# Altium PCB Webbie-V3.2.PcbDoc (part 2 of 3)
Units mil, origin at the board's own origin, x right, y up, seen from the top; angles counter-clockwise.
Board outline 3937.01 x 1574.8 mil, 4 copper layers (Top Layer, Layer 1, Layer 2, Bottom Layer), stack 61.865 mil thick; 123 components, 84 nets, 458 pads, 249 vias.
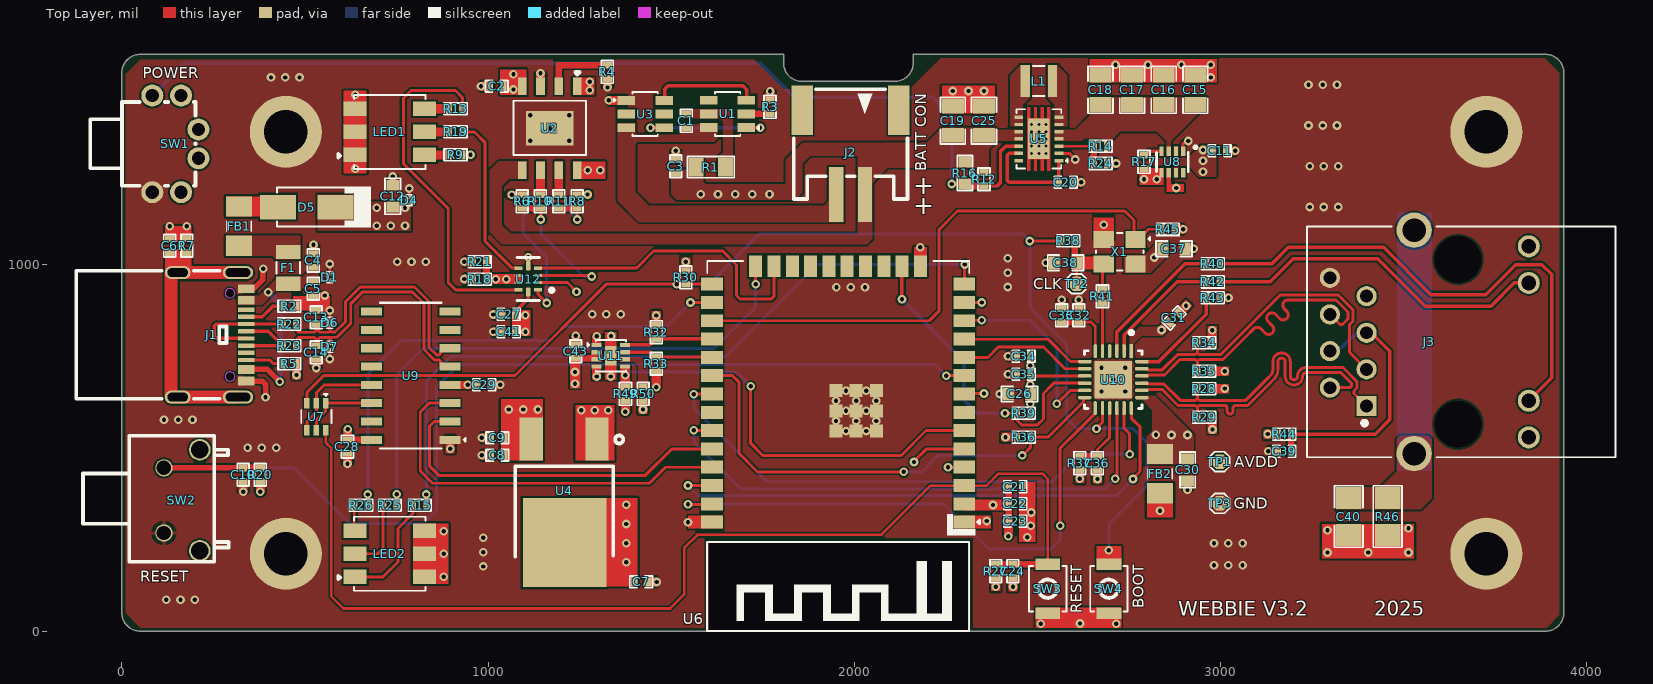
[diagram p0: Top Layer view]

## Part data (continued)
R2 R5: library part RC0402FR-075K1L, "RES 5.1K OHM 1% 1/16W 0402", Case Code (Imperial)=0402, Case Code (Metric)=1005, LCSC Part Number=C105872, Manufacturer=Yageo, Max Operating Temperature=155°C, Max Power Dissipation=63mW, Min Operating Temperature=-55°C, Package Quantity=1, Resistance=5.1kR, Resistance Tolerance=1%, Resistor Type="Thick Film", Temperature Coefficient=100ppm/°C, Voltage Rating=50V, Case/Package=0402, Category="Chip SMD Resistors", ComponentLink1Description=https://datasheet.ciiva.com/7983/1018594-7983519.pdf?src-supplier=Element14, ComponentLink1URL=https://datasheet.ciiva.com/7983/1018594-7983519.pdf?src-supplier=Element14, ComponentLink2Description=https://datasheet.ciiva.com/46394/1018594-46394936.pdf?src-supplier=Element14, ComponentLink2URL=https://datasheet.ciiva.com/46394/1018594-46394936.pdf?src-supplier=Element14, ComponentLink3Description=https://datasheet.ciiva.com/2453/pyu-r-int-thick-7-2453401.pdf?src-supplier=Digi-Key, ComponentLink3URL=https://datasheet.ciiva.com/2453/pyu-r-int-thick-7-2453401.pdf?src-supplier=Digi-Key, ComponentLink4Description=https://datasheet.ciiva.com/2453/pyu-r-int-thick-7-2453402.pdf?src-supplier=Digi-Key, ComponentLink4URL=https://datasheet.ciiva.com/2453/pyu-r-int-thick-7-2453402.pdf?src-supplier=Digi-Key, ComponentLink5Description=https://datasheet.ciiva.com/2453/pyu-r-int-thick-7-2453400.pdf?src-supplier=Digi-Key, ComponentLink5URL=https://datasheet.ciiva.com/2453/pyu-r-int-thick-7-2453400.pdf?src-supplier=Digi-Key, ComponentLink6Description=https://datasheet.ciiva.com/12558/pyu-rc0402-51-rohs-l-6-r-8721-12558460.pdf?src-supplier=Mouser, ComponentLink6URL=https://datasheet.ciiva.com/12558/pyu-rc0402-51-rohs-l-6-r-8721-12558460.pdf?src-supplier=Mouser, ComponentLink7Description=https://datasheet.ciiva.com/16744/pyu-rc0402-51-rohs-l-6-r-16744283.pdf?src-supplier=Future+Electronics, ComponentLink7URL=https://datasheet.ciiva.com/16744/pyu-rc0402-51-rohs-l-6-r-16744283.pdf?src-supplier=Future+Electronics, ComponentLink8Description=https://datasheet.ciiva.com/15189/getdatasheetpartid-323636-15189493.pdf?src-supplier=Verical, ComponentLink8URL=https://datasheet.ciiva.com/15189/getdatasheetpartid-323636-15189493.pdf?src-supplier=Verical, Construction=Rectangular, Depth=0.5mm, Features="Moisture Resistant", Height=0.016inch, Item Type=Resistor, Lead Free="Lead Free", Length=1mm, Manufacturer Part Number=RC0402FR-075K1L, Military Standard=Not, Number of Terminations=2, Packaging="Tape and Reel", Power Rating=63mW, Pricing 1="10000=0.00085 (USD)", RoHS=Yes, RoHS Compliant=Yes, Series=RC, Stock 1=65000, Supplier 1=Avnet, Supplier Part Number 1=RC0402FR-075K1L, Technology="THICK FILM", Termination=SMD/SMT, Tolerance=1%, Voltage Rating (DC)=50V, Width=0.02inch, Working Voltage=50V
R3: library part CRCW04021K00FKEDHP, "RES SMD 1K OHM 1% 1/5W 0402", Case Code (Imperial)=0402, Case Code (Metric)=1005, LCSC Part Number=C313354, Manufacturer="Vishay Dale", Max Operating Temperature=155°C, Max Power Dissipation=125mW, Min Operating Temperature=-55°C, Package Quantity=10, Resistance=1kR, Resistance Tolerance=1%, Resistor Type="Thick Film", Supplier Part Number 1=541-1.00KYCT-ND, Temperature Coefficient=100ppm/°C, Voltage Rating=50V, Case/Package=0402, ComponentLink1Description=http://www.farnell.com/datasheets/2339608.pdf?src-supplier=Element14, ComponentLink1URL=http://www.farnell.com/datasheets/2339608.pdf?src-supplier=Element14, ComponentLink2Description=http://www.vishay.com/docs/20043/crcwhpe3.pdf?src-supplier=Digi-Key, ComponentLink2URL=http://www.vishay.com/docs/20043/crcwhpe3.pdf?src-supplier=Digi-Key, ComponentLink3Description=http://www.mouser.com/ds/2/427/crcwhpe3-46056.pdf?src-supplier=Mouser, ComponentLink3URL=http://www.mouser.com/ds/2/427/crcwhpe3-46056.pdf?src-supplier=Mouser, ComponentLink4Description=http://www.vishay.com/docs/20043/crcwhpe3.pdf?src-supplier=Avnet, ComponentLink4URL=http://www.vishay.com/docs/20043/crcwhpe3.pdf?src-supplier=Avnet, ComponentLink5Description=http://www.vishay.com/docs/20043/crcwhpe3.pdf?src-supplier=Future+Electronics, ComponentLink5URL=http://www.vishay.com/docs/20043/crcwhpe3.pdf?src-supplier=Future+Electronics, Construction=Rectangular, Contact Plating=Tin, Depth=0.5mm, Features="Automotive AEC-Q200", Height=0.3mm, Lead Free="Lead Free", Length=1mm, Manufacturer Part Number=CRCW04021K00FKEDHP, Military Standard=Not, Mount="Surface Mount", Number of Pins=2, Number of Terminations=2, Packaging="Tape and Reel", Power Rating=125mW, Pricing 1="1=0.15, 10=0.132, 100=0.0506, 1000=0.02226, 2500=0.01923, 5000=0.0172 (USD)", Radiation Hardening=No, REACH SVHC=Unknown, RoHS Compliant=Yes, Series=CRCW-HP, Size Code=0402, Stock 1=315989, Supplier 1=Digi-Key, Technology="THICK FILM", Termination=SMD/SMT, Tolerance=1%, Voltage Rating (DC)=50V, Weight=2.3E-05oz, Width=0.5mm
R4: library part RC0402FR-071K2L, "RES 1.2K OHM 1% 1/16W 0402", Case Code (Imperial)=0402, Case Code (Metric)=1005, LCSC Part Number=C138040, Manufacturer=Yageo, Max Operating Temperature=155°C, Max Power Dissipation=63mW, Min Operating Temperature=-55°C, Package Quantity=1, Resistance=1.2kR, Resistance Tolerance=1%, Resistor Type="Thick Film", Temperature Coefficient=100ppm/°C, Voltage Rating=50V, Case/Package=0402, Category="Chip SMD Resistors", ComponentLink1Description=https://datasheet.ciiva.com/11808/0900766b80c66297-11808455.pdf?src-supplier=RSComponents, ComponentLink1URL=https://datasheet.ciiva.com/11808/0900766b80c66297-11808455.pdf?src-supplier=RSComponents, ComponentLink2Description=https://datasheet.ciiva.com/2453/pyu-r-int-thick-7-2453467.pdf?src-supplier=Digi-Key, ComponentLink2URL=https://datasheet.ciiva.com/2453/pyu-r-int-thick-7-2453467.pdf?src-supplier=Digi-Key, ComponentLink3Description=https://datasheet.ciiva.com/2453/pyu-r-int-thick-7-2453468.pdf?src-supplier=Digi-Key, ComponentLink3URL=https://datasheet.ciiva.com/2453/pyu-r-int-thick-7-2453468.pdf?src-supplier=Digi-Key, ComponentLink4Description=https://datasheet.ciiva.com/2453/pyu-r-int-thick-7-2453466.pdf?src-supplier=Digi-Key, ComponentLink4URL=https://datasheet.ciiva.com/2453/pyu-r-int-thick-7-2453466.pdf?src-supplier=Digi-Key, ComponentLink5Description=https://datasheet.ciiva.com/7849/1018594-7849861.pdf?src-supplier=Element14, ComponentLink5URL=https://datasheet.ciiva.com/7849/1018594-7849861.pdf?src-supplier=Element14, ComponentLink6Description=https://datasheet.ciiva.com/7849/1018594-7849862.pdf?src-supplier=Element14, ComponentLink6URL=https://datasheet.ciiva.com/7849/1018594-7849862.pdf?src-supplier=Element14, ComponentLink7Description=https://datasheet.ciiva.com/15189/getdatasheetpartid-323716-15189366.pdf?src-supplier=Verical, ComponentLink7URL=https://datasheet.ciiva.com/15189/getdatasheetpartid-323716-15189366.pdf?src-supplier=Verical, ComponentLink8Description=https://datasheet.ciiva.com/16745/pyu-rc0402-51-rohs-l-6-r-16745005.pdf?src-supplier=Future+Electronics, ComponentLink8URL=https://datasheet.ciiva.com/16745/pyu-rc0402-51-rohs-l-6-r-16745005.pdf?src-supplier=Future+Electronics, Construction=Rectangular, Depth=0.5mm, Features="Moisture Resistant", Height=0.016inch, Item Type=Resistor, Lead Free="Lead Free", Length=0.039inch, Manufacturer Part Number=RC0402FR-071K2L, Military Standard=Not, Number of Terminations=2, Packaging="Tape and Reel", Power Rating=63mW, Pricing 1="10000=0.00085 (USD)", RoHS=Yes, RoHS Compliant=Yes, Series=RC, Size Code=0402, Stock 1=170000, Supplier 1=Avnet, Supplier Part Number 1=RC0402FR-071K2L, Technology="THICK FILM", Termination=SMD/SMT, Tolerance=1%, Width=0.02inch
R6 R8 R17 R18 R20 R21 R27 R30 R32 R33 R37 R39 R45 R49 R50: library part RC0402FR-0710KL, "RES 10K OHM 1% 1/16W 0402", Case Code (Imperial)=0402, Case Code (Metric)=1005, LCSC Part Number=C60490, Manufacturer=Yageo, Max Operating Temperature=155°C, Max Power Dissipation=63mW, Min Operating Temperature=-55°C, Power Rating=62.5mW, Resistance=10kR, Resistance Tolerance=1%, Resistor Type="Thick Film", Supplier Part Number 1=603-RC0402FR-0710KL, Temperature Coefficient=100ppm/°C, Voltage Rating=50V, Case/Package=0402, Category="Chip SMD Resistors", ComponentLink1Description=https://datasheet.ciiva.com/7660/38568-7660787.pdf?src-supplier=Element14, ComponentLink1URL=https://datasheet.ciiva.com/7660/38568-7660787.pdf?src-supplier=Element14, ComponentLink2Description=https://datasheet.ciiva.com/7849/1686128-7849814.pdf?src-supplier=Element14, ComponentLink2URL=https://datasheet.ciiva.com/7849/1686128-7849814.pdf?src-supplier=Element14, ComponentLink3Description=https://datasheet.ciiva.com/7983/1018594-7983486.pdf?src-supplier=Element14, ComponentLink3URL=https://datasheet.ciiva.com/7983/1018594-7983486.pdf?src-supplier=Element14, ComponentLink4Description=https://datasheet.ciiva.com/22747/1018594-22747512.pdf?src-supplier=Element14, ComponentLink4URL=https://datasheet.ciiva.com/22747/1018594-22747512.pdf?src-supplier=Element14, ComponentLink5Description=https://datasheet.ciiva.com/12667/pyu-rc0402-51-rohs-l-6-r-12667067.pdf?src-supplier=Mouser, ComponentLink5URL=https://datasheet.ciiva.com/12667/pyu-rc0402-51-rohs-l-6-r-12667067.pdf?src-supplier=Mouser, ComponentLink6Description=https://datasheet.ciiva.com/7849/1784430-7849813.pdf?src-supplier=Element14, ComponentLink6URL=https://datasheet.ciiva.com/7849/1784430-7849813.pdf?src-supplier=Element14, ComponentLink7Description=https://datasheet.ciiva.com/7849/1784430-7849815.pdf?src-supplier=Element14, ComponentLink7URL=https://datasheet.ciiva.com/7849/1784430-7849815.pdf?src-supplier=Element14, Construction=Rectangular, Depth=0.5mm, Features="Moisture Resistant", Height=0.32mm, Item Type=Resistor, Lead Free="Lead Free", Lead Pitch=0.2mm, Length=1mm, Manufacturer Part Number=RC0402FR-0710KL, Military Standard=Not, Number of Pins=2, Number of Terminations=2, Packaging="Tape and Reel", Pricing 1="1=0.10000, 10=0.01400, 50=0.01400, 100=0.00500, 1000=0.00300, 10000=0.00200 (USD)", REACH SVHC="No SVHC", RoHS=Yes, RoHS Compliant=Yes, Series=RC, Stock 1=18648329, Supplier 1=Mouser, Termination=SMD/SMT, Tolerance=1%, Voltage Rating (DC)=50V, Width=0.5mm, Working Voltage=50V
R7: library part AF0402JR-071ML, "RES SMD 1M OHM 5% 1/16W 0402", Case/Package=0402, LCSC Part Number=C144054, Manufacturer=Yageo, Max Operating Temperature=155°C, Max Power Dissipation=63mW, Min Operating Temperature=-55°C, Resistance=1MR, Resistor Type="Thick Film", Supplier Part Number 1=AF0402JR-071ML-ND, Temperature Coefficient=100ppm/°C, Tolerance=5%, ComponentLink1Description=https://www.yageo.com/upload/media/product/productsearch/datasheet/rchip/PYu-AF_51_RoHS_L_6.pdf?src-supplier=Digi-Key, ComponentLink1URL=https://www.yageo.com/upload/media/product/productsearch/datasheet/rchip/PYu-AF_51_RoHS_L_6.pdf?src-supplier=Digi-Key, Features="Moisture Resistant,Anti-Sulfur", Height=0.015inch, Item Type=Resistor, Length=0.039inch, Manufacturer Part Number=AF0402JR-071ML, Number of Terminations=2, Packaging="Tape and Reel", Pricing 1="10000=0.00408 (USD)", RoHS Compliant=Yes, Stock 1=0, Supplier 1=Digi-Key, Width=0.02inch
R9 R13 R15 R19 R25 R26 R40 R42: library part RC0402FR-07470RL, "RES 470 OHM 1% 1/16W 0402", Case Code (Imperial)=0402, Case Code (Metric)=1005, LCSC Part Number=C114877, Manufacturer=Yageo, Max Operating Temperature=155°C, Max Power Dissipation=63mW, Min Operating Temperature=-55°C, Package Quantity=1, Power Rating=62.5mW, Resistance Tolerance=1%, Resistor Type="Thick Film", Temperature Coefficient=100ppm/°C, Voltage Rating=50V, Case/Package=0402, ComponentLink1Description=https://datasheet.ciiva.com/46412/1018594-46412838.pdf?src-supplier=Element14, ComponentLink1URL=https://datasheet.ciiva.com/46412/1018594-46412838.pdf?src-supplier=Element14, ComponentLink2Description=https://datasheet.ciiva.com/2453/pyu-r-int-thick-7-2453377.pdf?src-supplier=Digikey, ComponentLink2URL=https://datasheet.ciiva.com/2453/pyu-r-int-thick-7-2453377.pdf?src-supplier=Digikey, ComponentLink3Description=https://datasheet.ciiva.com/2453/pyu-r-int-thick-7-2453378.pdf?src-supplier=Digikey, ComponentLink3URL=https://datasheet.ciiva.com/2453/pyu-r-int-thick-7-2453378.pdf?src-supplier=Digikey, ComponentLink4Description=https://datasheet.ciiva.com/2453/pyu-r-int-thick-7-2453376.pdf?src-supplier=Digikey, ComponentLink4URL=https://datasheet.ciiva.com/2453/pyu-r-int-thick-7-2453376.pdf?src-supplier=Digikey, ComponentLink5Description=https://datasheet.ciiva.com/7850/1018594-7850015.pdf?src-supplier=Element14, ComponentLink5URL=https://datasheet.ciiva.com/7850/1018594-7850015.pdf?src-supplier=Element14, ComponentLink6Description=https://datasheet.ciiva.com/7850/1018594-7850014.pdf?src-supplier=Element14, ComponentLink6URL=https://datasheet.ciiva.com/7850/1018594-7850014.pdf?src-supplier=Element14, ComponentLink7Description=https://datasheet.ciiva.com/15189/getdatasheetpartid-330246-15189463.pdf?src-supplier=Verical, ComponentLink7URL=https://datasheet.ciiva.com/15189/getdatasheetpartid-330246-15189463.pdf?src-supplier=Verical, Construction=Rectangular, Depth=0.5mm, Features="Moisture Resistant", Height=0.016inch, Item Type=Resistor, Lead Free="Lead Free", Length=1mm, Manufacturer Part Number=RC0402FR-07470RL, Military Standard=Not, Number of Terminations=2, Packaging="Tape and Reel", Pricing="10000=0.00085 (USD)", Reach SVHC Compliant=No, RoHS=Yes, RoHS Compliant=Yes, Series=RC, Stock=10000, Supplier=Avnet, Supplier Part Number=RC0402FR-07470RL, Termination=SMD/SMT, Tolerance=1%, Voltage Rating (AC)=50V, Width=0.02inch, Working Voltage=50V
R10 R11 R12 R44: library part RC0402FR-070RL, "RES 0 OHM JUMPER 1/16W 0402", Case Code (Imperial)=0402, Case Code (Metric)=1005, LCSC Part Number=C106231, Manufacturer=Yageo, Max Operating Temperature=155°C, Max Power Dissipation=63mW, Min Operating Temperature=-55°C, Power Rating=62.5mW, Resistor Type="Thick Film", Supplier Part Number 1=603-RC0402FR-070RL, Temperature Coefficient=200ppm/°C, Tolerance=1%, Voltage Rating=50V, Case/Package=0402, ComponentLink1Description=https://datasheet.ciiva.com/8896/pyu-rc0402-51-rohs-l-6-8896149.pdf?src-supplier=Avnet, ComponentLink1URL=https://datasheet.ciiva.com/8896/pyu-rc0402-51-rohs-l-6-8896149.pdf?src-supplier=Avnet, ComponentLink2Description=https://datasheet.ciiva.com/16790/pyu-rc0402-51-rohs-l-6-r-16790444.pdf?src-supplier=Future+Electronics, ComponentLink2URL=https://datasheet.ciiva.com/16790/pyu-rc0402-51-rohs-l-6-r-16790444.pdf?src-supplier=Future+Electronics, Contact Plating=Tin,Matte, Features="Moisture Resistant", Height=0.35mm, Item Type=Resistors, Lead Free="Lead Free", Length=1mm, Manufacturer Part Number=RC0402FR-070RL, Mount="Surface Mount", Number of Terminations=2, Packaging="Tape and Reel", Pricing 1="1=0.10000, 10=0.01400, 50=0.01400, 100=0.00600, 1000=0.00300, 5000=0.00200, 10000=0.00100 (USD)", Radiation Hardening=No, Resistance=0R, RoHS=Yes, RoHS Compliant=Yes, Series=RC, Size Code=0402, Stock 1=8556842, Supplier 1=Mouser, Termination=SMD/SMT, Width=0.5mm
R14: library part AC0402FR-07768KL, "62.5mW Thick Film Resistor 50V ±100ppm/℃ ±1% 768kΩ 0402 Chip Resistor - Surface Mount ROHS", LCSC Part Number=C227223, Manufacturer=YAGEO, Package=0402, ComponentLink1Description="LCSC Link", ComponentLink1URL=https://lcsc.com/product-detail/Chip-Resistor-Surface-Mount_YAGEO-AC0402FR-07768KL_C227223.html, Item Type=Resistor, Manufacturer Part Number=AC0402FR-07768KL
R16: library part RT0603BRD0710KL, "RES SMD 10K OHM 0.1% 1/10W 0603", Case/Package=0603, LCSC Part Number=C95204, Manufacturer=Yageo, Max Operating Temperature=155°C, Min Operating Temperature=-55°C, Package Height=0.45mm, Package Length=1.6mm, Package Style=SMTMeter, Package Width=0.8mm, Power=100mW, Rated Temperature=70°C, Resistor Type="FIXED RESISTOR", Supplier Part Number 1=1991391P, Temperature Coefficient=25ppm/°C, Tolerance=0.1%, Working Voltage=75V, Category="Chip SMD Resistors", ComponentLink1Description=https://datasheet.ciiva.com:443/pdfs/VipMasterIC/IC/YAGO/YAGO-S-A0008510989/YAGO-S-A0008510989-1.pdf?src-supplier=IHS+Markit, ComponentLink1URL=https://datasheet.ciiva.com:443/pdfs/VipMasterIC/IC/YAGO/YAGO-S-A0008510989/YAGO-S-A0008510989-1.pdf?src-supplier=IHS+Markit, ComponentLink2Description=https://datasheet.ciiva.com/5624/pyu-rt-1-to-0-05-rohs-l-4-5624351.pdf?src-supplier=Mouser, ComponentLink2URL=https://datasheet.ciiva.com/5624/pyu-rt-1-to-0-05-rohs-l-4-5624351.pdf?src-supplier=Mouser, ComponentLink3Description=https://datasheet.ciiva.com/29721/pyu-rt-1-to-0-05-rohs-l-4-29721177.pdf?src-supplier=Digi-Key, ComponentLink3URL=https://datasheet.ciiva.com/29721/pyu-rt-1-to-0-05-rohs-l-4-29721177.pdf?src-supplier=Digi-Key, Construction=Chip, Item Type=Resistor, Manufacturer Part Number=RT0603BRD0710KL, Mounting Technology="Surface Mount", Packaging="Tape and Reel", Pins=2, Pricing 1="100=0.29800, 250=0.27800, 500=0.25900, 1000=0.23700 (GBP)", Reach SVHC Compliant=Yes, RoHS=Yes, RoHS Compliant=Yes, Stock 1=20510, Supplier 1=Rs, Technology="THIN FILM", Termination=Wraparound
R22 R23: library part RC0402FR-0727RL, "62.5mW Thick Film Resistors 50V ±100ppm/℃ ±1% 27Ω 0402 Chip Resistor - Surface Mount ROHS", LCSC Part Number=C138021, Manufacturer=YAGEO, Package=0402, ComponentLink1Description="LCSC Link", ComponentLink1URL=https://www.lcsc.com/product-detail/Chip-Resistor-Surface-Mount_YAGEO-RC0402FR-0727RL_C138021.html, Item Type=Resistor, Manufacturer Part Number=RC0402FR-0727RL
R24: library part FRC0402F1373TS, "62.5mW Thick Film Resistor 50V ±100ppm/℃ ±1% 137kΩ 0402 Chip Resistor - Surface Mount ROHS", LCSC Part Number=C5153963, Manufacturer=FOJAN, Package=0402, ComponentLink1Description="LCSC Link", ComponentLink1URL=https://lcsc.com/product-detail/Chip-Resistor-Surface-Mount_FOJAN-FRC0402F1373TS_C5153963.html, Item Type=Resistor, Manufacturer Part Number=FRC0402F1373TS
R28 R29 R34 R35: library part RC0402FR-0749R9L, "49.9Ω 62.5mW 50V ±100ppm/℃ Thick Film Resistor ±1% 0402 Chip Resistor - Surface Mount ROHS", LCSC Part Number=C87044, Manufacturer=YAGEO, Package=0402, ComponentLink1Description="LCSC Link", ComponentLink1URL=https://www.lcsc.com/product-detail/C87044.html, Item Type=Resistor, Manufacturer Part Number=RC0402FR-0749R9L
R36: library part RC0402FR-071K5L, "RES 1.5K OHM 1% 1/16W 0402", Case Code (Imperial)=0402, Case Code (Metric)=1005, LCSC Part Number=C114759, Manufacturer=Yageo, Max Operating Temperature=155°C, Max Power Dissipation=63mW, Min Operating Temperature=-55°C, Package Quantity=1, Power Rating=62.5mW, Resistance=1.5kR, Resistance Tolerance=1%, Resistor Type="Thick Film", Supplier Part Number 1=311-1.50KLRCT-ND, Temperature Coefficient=100ppm/°C, Voltage Rating=50V, Case/Package=0402, Category="Chip SMD Resistors", ComponentLink1Description=https://datasheet.ciiva.com/11808/0900766b80c66297-11808238.pdf?src-supplier=RSComponents, ComponentLink1URL=https://datasheet.ciiva.com/11808/0900766b80c66297-11808238.pdf?src-supplier=RSComponents, ComponentLink2Description=https://datasheet.ciiva.com/46394/1018594-46394950.pdf?src-supplier=Element14, ComponentLink2URL=https://datasheet.ciiva.com/46394/1018594-46394950.pdf?src-supplier=Element14, ComponentLink3Description=https://datasheet.ciiva.com/2453/pyu-r-int-thick-7-2453440.pdf?src-supplier=Digi-Key, ComponentLink3URL=https://datasheet.ciiva.com/2453/pyu-r-int-thick-7-2453440.pdf?src-supplier=Digi-Key, ComponentLink4Description=https://datasheet.ciiva.com/2453/pyu-r-int-thick-7-2453441.pdf?src-supplier=Digi-Key, ComponentLink4URL=https://datasheet.ciiva.com/2453/pyu-r-int-thick-7-2453441.pdf?src-supplier=Digi-Key, ComponentLink5Description=https://datasheet.ciiva.com/2453/pyu-r-int-thick-7-2453439.pdf?src-supplier=Digi-Key, ComponentLink5URL=https://datasheet.ciiva.com/2453/pyu-r-int-thick-7-2453439.pdf?src-supplier=Digi-Key, ComponentLink6Description=https://datasheet.ciiva.com/12558/pyu-rc0402-51-rohs-l-6-r-8721-12558542.pdf?src-supplier=Mouser, ComponentLink6URL=https://datasheet.ciiva.com/12558/pyu-rc0402-51-rohs-l-6-r-8721-12558542.pdf?src-supplier=Mouser, ComponentLink7Description=https://datasheet.ciiva.com/7849/1018594-7849863.pdf?src-supplier=Element14, ComponentLink7URL=https://datasheet.ciiva.com/7849/1018594-7849863.pdf?src-supplier=Element14, ComponentLink8Description=https://datasheet.ciiva.com/7849/1018594-7849864.pdf?src-supplier=Element14, ComponentLink8URL=https://datasheet.ciiva.com/7849/1018594-7849864.pdf?src-supplier=Element14, ComponentLink9Description=https://datasheet.ciiva.com/15189/getdatasheetpartid-323992-15189370.pdf?src-supplier=Verical, ComponentLink9URL=https://datasheet.ciiva.com/15189/getdatasheetpartid-323992-15189370.pdf?src-supplier=Verical, Construction=Rectangular, Depth=0.5mm, Features="Moisture Resistant", Height=0.016inch, Lead Free="Lead Free", Length=1mm, Manufacturer Part Number=RC0402FR-071K5L, Military Standard=Not, Number of Terminations=2, Packaging="Tape and Reel", Pricing 1="1=0.10000, 10=0.01500, 100=0.00610, 1000=0.00275, 2500=0.00239, 5000=0.00197 (USD)", REACH SVHC="No SVHC", RoHS=Yes, RoHS Compliant=Yes, Series=RC, Size Code=0402, Stock 1=2832947, Supplier 1=Digi-Key, Technology="THICK FILM", Termination=SMD/SMT, Tolerance=1%, Width=0.02inch
R38 R41: library part RC0402FR-0733RL, "RES 33 OHM 1% 1/16W 0402", Case Code (Imperial)=0402, Case Code (Metric)=1005, LCSC Part Number=C138002, Manufacturer=Yageo, Max Operating Temperature=155°C, Max Power Dissipation=63mW, Min Operating Temperature=-55°C, Package Quantity=10000, Power Rating=62.5mW, Resistance Tolerance=1%, Resistor Type="Thick Film", Supplier Part Number 1=603-RC0402FR-0733RL, Temperature Coefficient=100ppm/°C, Voltage Rating=50V, Case/Package=0402, Category="Chip SMD Resistors", ComponentLink1Description=https://datasheet.ciiva.com/11819/0900766b80c66297-11819487.pdf?src-supplier=RSComponents, ComponentLink1URL=https://datasheet.ciiva.com/11819/0900766b80c66297-11819487.pdf?src-supplier=RSComponents, ComponentLink2Description=https://datasheet.ciiva.com/24070/pyu-rc0402-51-rohs-l-6-r-8721-24070077.pdf?src-supplier=Mouser, ComponentLink2URL=https://datasheet.ciiva.com/24070/pyu-rc0402-51-rohs-l-6-r-8721-24070077.pdf?src-supplier=Mouser, ComponentLink3Description=https://datasheet.ciiva.com/7849/1018594-7849967.pdf?src-supplier=Element14, ComponentLink3URL=https://datasheet.ciiva.com/7849/1018594-7849967.pdf?src-supplier=Element14, ComponentLink4Description=https://datasheet.ciiva.com/7849/1018594-7849966.pdf?src-supplier=Element14, ComponentLink4URL=https://datasheet.ciiva.com/7849/1018594-7849966.pdf?src-supplier=Element14, ComponentLink5Description=https://datasheet.ciiva.com/15189/getdatasheetpartid-329253-15189431.pdf?src-supplier=Verical, ComponentLink5URL=https://datasheet.ciiva.com/15189/getdatasheetpartid-329253-15189431.pdf?src-supplier=Verical, ComponentLink6Description=https://datasheet.ciiva.com/17070/pyu-rc0402-51-rohs-l-6-r-17070335.pdf?src-supplier=Future+Electronics, ComponentLink6URL=https://datasheet.ciiva.com/17070/pyu-rc0402-51-rohs-l-6-r-17070335.pdf?src-supplier=Future+Electronics, Construction=Rectangular, Depth=0.5mm, Features="Moisture Resistant", Height=0.35mm, Lead Free="Lead Free", Length=1mm, Manufacturer Part Number=RC0402FR-0733RL, Military Standard=Not, Number of Pins=2, Number of Terminations=2, Packaging="Tape and Reel", Pricing 1="1=0.10000, 10=0.01200, 50=0.01200, 100=0.00500, 1000=0.00300, 10000=0.00100 (USD)", REACH SVHC=Unknown, Resistance=33R, RoHS=Yes, RoHS Compliant=Yes, Series=RC, Size Code=0402, Stock 1=1843488, Supplier 1=Mouser, Technology="THICK FILM", Termination=SMD/SMT, Tolerance=1%, Voltage Rating (DC)=50V, Width=0.5mm
R43: library part RT0402BRD0712K1L, "RES SMD 12.1KOHM 0.1% 1/16W 0402", LCSC Part Number=C281773, Manufacturer=Yageo, Supplier Part Number=2068365, Category="Chip SMD Resistors", ComponentLink1Description=https://datasheet.ciiva.com/12812/pyu-rt-1-to-0-05-rohs-l-4-12812462.pdf?src-supplier=Mouser, ComponentLink1URL=https://datasheet.ciiva.com/12812/pyu-rt-1-to-0-05-rohs-l-4-12812462.pdf?src-supplier=Mouser, Item Type=Resistor, Manufacturer Part Number=RT0402BRD0712K1L, Pricing="10000=0.0245, 20000=0.0217, 30000=0.0237, 50000=0.0233, 100000=0.0228, 200000=0.022 (USD)", RoHS=Yes, Stock=60000, Supplier="Future Electronics"
R46: library part RC1206FR-071ML, "RES 1M OHM 1% 1/4W 1206", Case Code (Imperial)=1206, Case Code (Metric)=3216, LCSC Part Number=C108083, Manufacturer=Yageo, Max Operating Temperature=155°C, Max Power Dissipation=250mW, Min Operating Temperature=-55°C, Package Quantity=5000, Resistance=1MR, Resistance Tolerance=1%, Resistor Type="Thick Film", Temperature Coefficient=100ppm/°C, Voltage Rating=200V, Case/Package=1206, Category="Chip SMD Resistors", ComponentLink1Description=https://datasheet.ciiva.com/11819/0900766b80c6630a-11819912.pdf?src-supplier=RSComponents, ComponentLink1URL=https://datasheet.ciiva.com/11819/0900766b80c6630a-11819912.pdf?src-supplier=RSComponents, ComponentLink2Description=https://datasheet.ciiva.com/46445/444357-46445709.pdf?src-supplier=Element14, ComponentLink2URL=https://datasheet.ciiva.com/46445/444357-46445709.pdf?src-supplier=Element14, ComponentLink3Description=https://datasheet.ciiva.com/7857/444357-7857289.pdf?src-supplier=Element14, ComponentLink3URL=https://datasheet.ciiva.com/7857/444357-7857289.pdf?src-supplier=Element14, ComponentLink4Description=https://datasheet.ciiva.com/7857/444357-7857288.pdf?src-supplier=Element14, ComponentLink4URL=https://datasheet.ciiva.com/7857/444357-7857288.pdf?src-supplier=Element14, ComponentLink5Description=https://datasheet.ciiva.com/17033/pyu-rc1206-51-rohs-l-4-17033611.pdf?src-supplier=Future+Electronics, ComponentLink5URL=https://datasheet.ciiva.com/17033/pyu-rc1206-51-rohs-l-4-17033611.pdf?src-supplier=Future+Electronics, Construction=Rectangular, Depth=1.6mm, Features="Moisture Resistant", Height=0.55mm, Item Type=Resistor, Lead Free="Lead Free", Length=3.1mm, Manufacturer Part Number=RC1206FR-071ML, Military Standard=Not, Number of Terminations=2, Packaging="Tape and Reel", Power Rating=250mW, Pricing 1="5000=0.00412, 10000=0.00406, 20000=0.00394 (USD)", RoHS=Yes, RoHS Compliant=Yes, Series=RC, Size Code=1206, Stock 1=935000, Supplier 1=Avnet, Supplier Part Number 1=RC1206FR-071ML, Technology="THICK FILM", Termination=SMD/SMT, Tolerance=1%, Width=1.6mm
SW1: "Latching Right Angle DPDT 2.5N Through Hole Pushbutton Switches ROHS", LCSC Part Number=C528772, Manufacturer=Yuandi, Package="Through Hole", ComponentLink1Description="LCSC Link", ComponentLink1URL=https://lcsc.com/product-detail/Pushbutton-Switches_Yuandi-TK-6580A8-1_C528772.html, Item Type=Switch, Manufacturer Part Number=TK-6580A8-1
SW2: "With Bracket 50mA Round Button Right Angle SPST 100,000 Cycles 1.6N 24V Through Hole Tactile Switches ROHS", LCSC Part Number=C2928195, Manufacturer="TE Connectivity", Package="Through Hole", ComponentLink1Description="LCSC Link", ComponentLink1URL=https://lcsc.com/product-detail/Tactile-Switches_TE-Connectivity-1-1825027-4_C2928195.html, Item Type="Tactile Switch", Manufacturer Part Number=1-1825027-4
SW3 SW4: "SWITCH TACTILE SPST-NO 0.05A 12V", Contact Current Rating=50mA, Contact Resistance=100mR, Insulation Resistance=100MR, LCSC Part Number=C231329, Manufacturer=Omron, Max Operating Temperature=70°C, Max Voltage Rating (DC)=12V, Min Operating Temperature=-25°C, Operating Force=1.5N, Package Quantity=1, Ratings="Dust Proof,IP40", Supplier Part Number 1=SW1020DKR-ND, Actuator Length=0.4mm, Actuator Type=Standard, ComponentLink1Description=http://www.farnell.com/datasheets/60838.pdf?src-supplier=Farnell, ComponentLink1URL=http://www.farnell.com/datasheets/60838.pdf?src-supplier=Farnell, ComponentLink2Description=http://www.farnell.com/datasheets/60838.pdf?src-supplier=Element14, ComponentLink2URL=http://www.farnell.com/datasheets/60838.pdf?src-supplier=Element14, ComponentLink3Description=https://omronfs.omron.com/en_US/ecb/products/pdf/en-b3u.pdf?src-supplier=Digi-Key, ComponentLink3URL=https://omronfs.omron.com/en_US/ecb/products/pdf/en-b3u.pdf?src-supplier=Digi-Key, ComponentLink4Description=http://www.omron.com/ecb/products/pdf/en-b3u.pdf?src-supplier=Digi-Key, ComponentLink4URL=http://www.omron.com/ecb/products/pdf/en-b3u.pdf?src-supplier=Digi-Key, ComponentLink5Description=https://www.distrelec.biz/Web/Downloads/he/et/B3U_eng_datasheet.pdf?mime=application%2Fpdf&src-supplier=Distrelec, ComponentLink5URL=https://www.distrelec.biz/Web/Downloads/he/et/B3U_eng_datasheet.pdf?mime=application%2Fpdf&src-supplier=Distrelec, ComponentLink6Description=http://www.onlinecomponents.com/productFiles/mf-OM/en-b3u.pdf?src-supplier=Onlinecomponents.com, ComponentLink6URL=http://www.onlinecomponents.com/productFiles/mf-OM/en-b3u.pdf?src-supplier=Onlinecomponents.com, ComponentLink7Description=https://www.verical.com/server-webapp/html/getDatasheet?partID=552554&src-supplier=Verical, ComponentLink7URL=https://www.verical.com/server-webapp/html/getDatasheet?partID=552554&src-supplier=Verical, ComponentLink8Description=http://www.farnell.com/datasheets/1685550.pdf?src-supplier=Element14, ComponentLink8URL=http://www.farnell.com/datasheets/1685550.pdf?src-supplier=Element14, ComponentLink9Description=http://www.farnell.com/datasheets/2610940.pdf?src-supplier=Farnell, ComponentLink9URL=http://www.farnell.com/datasheets/2610940.pdf?src-supplier=Farnell, ComponentLink10Description=https://www.alliedelec.com/m/d/4c8a9ef82804fc3c241a13c1e298fd73.pdf?src-supplier=Allied+Electronics, ComponentLink10URL=https://www.alliedelec.com/m/d/4c8a9ef82804fc3c241a13c1e298fd73.pdf?src-supplier=Allied+Electronics, Contact Material=Silver, Current Rating=50mA, Depth=2.5mm, Electrical Life=200000Cycles, Height=1.2mm, Illumination Type=Non-Illuminated,Illuminated, Item Type=Switch, Lead Free="Lead Free", Length=4mm, Manufacturer Part Number=B3U-1000P, Max Current Rating=50mA, Mechanical Life=200000Cycles, Mount="Surface Mount", Orientation=Straight, Packaging="Tape and Reel", Pricing 1="1=1, 10=0.961, 25=0.9064, 50=0.7976, 100=0.7251, 250=0.68888, 500=0.67074, 1000=0.52571 (USD)", REACH SVHC=Unknown, Stock 1=116454, Supplier 1=Digi-Key, Switch Function=Off-Mom, Switch Travel=0.15mm, Termination=SMD/SMT, Throw Configuration=SPST, Voltage Rating (DC)=12V, Weight=0.000776oz, Width=3mm
TP1 TP2 TP3: "Test Point ON", Item Type="Test Point", Manufacturer Part Number="TEST POINT 0.5mm Dia"
U1: "SOT-23-6 Battery Management ROHS", LCSC Part Number=C2909013, Manufacturer="Shenzhen Fuman Elec", Package=SOT-23-6, ComponentLink1Description=LCSC, ComponentLink1URL=https://www.lcsc.com/product-detail/Battery-Management_Shenzhen-Fuman-Elec-DW01-A-J_C2909013.html, Item Type=IC, Manufacturer Part Number=DW01-A/J
U2: "ESOP-8 Battery Management ICs ROHS", LCSC Part Number=C16581, Manufacturer=TOPPOWER, Package=ESOP-8, ComponentLink1Description=LCSC, ComponentLink1URL=https://www.lcsc.com/product-detail/Battery-Management-ICs_TOPPOWER-Nanjing-Extension-Microelectronics-TP4056-42-ESOP8_C16581.html, Item Type=IC, Manufacturer Part Number=TP4056-42-ESOP8
U3: "20V 5A 36mΩ@2.5V,3A 830mW 1.2V@250uA 2 N-Channel SOT-23-6 MOSFETs ROHS", LCSC Part Number=C351449, Manufacturer=UMW, Package=SOT-23-6, ComponentLink1Description=LCSC, ComponentLink1URL=https://www.lcsc.com/product-detail/MOSFETs_UMW-Youtai-Semiconductor-Co-Ltd-8205A_C351449.html, Item Type=IC, Manufacturer Part Number=8205A
U4: "72dB@(120Hz) Positive Fixed 3.3V TO-252-2(DPAK) Voltage Regulators - Linear, Low Drop Out (LDO) Regulators RoHS", LCSC Part Number=C125622, Manufacturer=UTC, Package=TO-252-2(DPAK), ComponentLink1Description="LCSC Link", ComponentLink1URL=https://www.lcsc.com/product-detail/C125622.html, Item Type="Linear Regulator", Manufacturer Part Number=UZ1085L-33-TN3-R
U5: "IC REG BUCK-BST ADJ 3.5A 14VSON", Case/Package=VSON, LCSC Part Number=C15483, Manufacturer="Texas Instruments", Max Operating Temperature=85°C, Max Output Current=3A, Max Output Voltage=5.5V, Min Input Voltage=1.8V, Min Operating Temperature=-40°C, Min Output Voltage=1.2V, Package Quantity=3000, Quiescent Current=50uA, Supplier Part Number=595-TPS63020DSJR, Switching Frequency=2.4MHz, Category="Voltage Regulators - Switching", ComponentLink1Description=https://datasheet.ciiva.com/29733/tps63021-29733058.pdf?src-supplier=Digi-Key, ComponentLink1URL=https://datasheet.ciiva.com/29733/tps63021-29733058.pdf?src-supplier=Digi-Key, ComponentLink2Description=https://datasheet.ciiva.com/29733/tps63020-29733142.pdf?src-supplier=Digi-Key, ComponentLink2URL=https://datasheet.ciiva.com/29733/tps63020-29733142.pdf?src-supplier=Digi-Key, ComponentLink3Description=https://datasheet.ciiva.com/3221/tps63020-3221509.pdf?src-supplier=Avnet, ComponentLink3URL=https://datasheet.ciiva.com/3221/tps63020-3221509.pdf?src-supplier=Avnet, Efficiency=96%, Item Type=IC, Lead Free="Lead Free", Manufacturer Part Number=TPS63020DSJR, Max Supply Voltage=5.5V, Min Supply Voltage=1.8V, Mounting Technology="Surface Mount", Number of Outputs=1, Operating Supply Voltage=5.5V, Output Configuration=Positive, Output Current=3A, Output Type=Adjustable, Output Voltage=5.5V, Packaging="Tape and Reel", Pins=14, Pricing="1=2.8, 10=2.43, 50=2.43, 100=2.07, 1000=1.46, 10000=1.36 (USD)", Reach SVHC Compliant=No, RoHS=Yes, RoHS Compliant=Yes, Series=-, Stock=18181, Supplier=Mouser, Supply Current=50uA, Synchronous Rectifier=Yes, Topology=Buck-Boost
U6: "RX TXRX MOD WIFI TRACE ANT SMD", LCSC Part Number=C701341, Manufacturer="Espressif Systems", Supplier Part Number 1=1965-ESP32-WROOM-32E(4MB)CT-ND, ComponentLink1Description="LCSC Link", ComponentLink1URL=https://lcsc.com/product-detail/WiFi-Modules_ESPRESSIF-ESP32-WROOM-32E-N4_C701341.html, Manufacturer Part Number=ESP32-WROOM-32E-N4, Pricing 1="1=3.00000 (USD)", RoHS=No, Supplier 1=Digi-Key
U7: "2 NPN pre-biased (Dual) 150mW 100mA 50V SC-70-6(SOT-363) Digital Transistors ROHS", LCSC Part Number=C62892, Manufacturer=Changjiang, ComponentLink1Description=LCSC, ComponentLink1URL=https://www.lcsc.com/product-detail/Digital-Transistors_Jiangsu-Changjing-Electronics-Technology-Co-Ltd-UMH3N_C62892.html, Item Type=Transistor, Manufacturer Part Number=UMH3N
U8: "1.6V to 5V, 2.5A dual ideal diodes with automatic switching function", LCSC Part Number=C3235556, Manufacturer=TI, Package=SOT-583, ComponentLink1Description="LCSC Link", ComponentLink1URL=https://www.lcsc.com/product-detail/C3235556.html, Item Type="ORING IC", Manufacturer Part Number=LM66200DRLR
U9: "2Mbps Transceiver USB 2.0 SOP-16 USB ICs ROHS", LCSC Part Number=C84681, Manufacturer=WCH, Package=SOP-16, ComponentLink1Description=LCSC, ComponentLink1URL=https://www.lcsc.com/product-detail/USB-ICs_WCH-Jiangsu-Qin-Heng-CH340C_C84681.html, Item Type=IC, Manufacturer Part Number=CH340C
U10: "IC TRANSCEIVER FULL 2/2 24SQFN", LCSC Part Number=C45223, Manufacturer=MICROCHIP, Max Operating Temperature=85°C, Min Operating Temperature=0°C, Package=QFN-24-EP(4x4), ComponentLink1Description="LCSC Link", ComponentLink1URL=https://www.lcsc.com/product-detail/C45223.html?s_z=n_LAN8720A, Item Type=RMII, Manufacturer Part Number=LAN8720A-CP-TR, Mount="Surface Mount", Packaging="Tape and Reel", Simplex/Duplex="Full Duplex"
U11: "IC BATT MON LI-ION 1CELL 8TDFN", LCSC Part Number=C2682616, Manufacturer=Maxim, Max Operating Temperature=85°C, Min Operating Temperature=-20°C, Operating Supply Current=23uA, Operating Supply Voltage=4.5V, Output Voltage=400mV, Package Quantity=10000, Supplier Part Number 1=700-MAX17048G+T10, Category="Battery Management", ComponentLink1Description=https://datasheet.ciiva.com/14083/max17048-max17049-14083973.pdf?src-supplier=Digi-Key, ComponentLink1URL=https://datasheet.ciiva.com/14083/max17048-max17049-14083973.pdf?src-supplier=Digi-Key, Contact Plating=Tin,Matte, Item Type=IC, Manufacturer Part Number=MAX17048G+T10, Mount="Surface Mount", Number of Pins=8, Packaging="Tape and Reel", Pricing 1="1=3.34000, 10=3.00000, 50=2.84000, 100=2.46000, 1000=1.89000, 10000=1.83000 (USD)", Radiation Hardening=No, RoHS=Yes, RoHS Compliant=Yes, Series=ModelGauge™, Stock 1=41293, Supplier 1=Mouser
U12: "IC SWITCH DUAL SPDT 10UQFN", Case/Package=QFN, High Level Output Current=300mA, LCSC Part Number=C575568, Manufacturer=TI, Max Operating Temperature=85°C, Max Supply Current=25nA, Max Supply Voltage=3.6V, Min Operating Temperature=-40°C, Min Supply Voltage=1.65V, On-State Resistance=600mR, Operating Supply Current=15nA, Operating Supply Voltage=3V, Package=UQFN-10(1.5x2), Package Quantity=1, Bandwidth=50MHz, ComponentLink1Description="LCSC Link", ComponentLink1URL=https://www.lcsc.com/product-detail/C575568.html, Contact Plating=Gold, Height=0.55mm, Item Type=MUX/DEMUX, Lead Free="Lead Free", Length=2.05mm, Low Level Output Current=300mA, Manufacturer Part Number=TS3A24157RSER, Mount="Surface Mount", Number of Channels=2, Number of Inputs=2, Number of Outputs=4, Number of Pins=10, Packaging="Tape and Reel", Polarity=Non-Inverting, Radiation Hardening=No, REACH SVHC="No SVHC", RoHS Compliant=Yes, Series=-, Supply Type=Single, Throw Configuration=SPDT, Turn-Off Delay Time=25ns, Turn-On Delay Time=35ns, Weight=0.000247oz, Width=1.55mm
X1: library part OT2EL4C4JI-111OLP-50M, "1.8V~3.3V ±10ppm ±20ppm CMOS 50MHz SMD3225-4P Crystal Oscillators ROHS", LCSC Part Number=C5203552, Manufacturer="YXC Crystal Oscillators", Package=SMD3225-4P, ComponentLink1Description="LCSC Link", ComponentLink1URL=https://lcsc.com/product-detail/Crystal-Oscillators_YXC-Crystal-Oscillators-OT2EL4C4JI-111OLP-50M_C5203552.html, Item Type=Crystal, Manufacturer Part Number=OT2EL4C4JI-111OLP-50M

## Free pads (board coordinates)
  round 196.85 hole 118.11 paste+4.8 mask+0.59: 10(447.72,211.49) 10(447.72,1363.31) 10(3725.51,211.49) 10(3725.51,1363.31)

## Via types
v1: diameter 23.62, hole 11.81, Top Layer to Bottom Layer, tented top, 249 vias

## Nets (pads, with @x,y where several pads share a name; then routed paths per layer and width w, separated by ;. In a path a pad name is that pad's centre, name@x,y a point inside that pad or via, vN(x,y) a via of type N, cw(c..) or ccw(c..) an arc to the next point about the centre after c; other vN are vias at no path point)
3.3V_ESP: C21.2 C22.2 C23.2 C26.2 C28.1 C29.1 C34.1 C35.1 C37.2 FB2.2 R18.1 R20.2 R21.1 R27.2 R30.2 R32.2 R33.2 R36.2 R37.2 R39.2 R49.2 SW1.4 SW1.6 U6.2 U9.4 U9.16 U10.9 U12.7 U12.8 X1.4 | length 6531.7
  Top Layer w8: C35.1@2485.21,696.84 U10.9@2629.22,696.84
  Layer 1 w15: SW1.4@161.74,1462.44 200.2,1462.44 208.98,1453.65 SW1.6@208.98,1369.92 ; SW1.6@208.98,1365.36 SW1.6@208.98,1369.92 ; v1(378.12,380.45) 457.63,380.45 615.08,537.9 615.08,549.81 v1(616.73,551.46) ; v1(1021.03,960.74) 944.53,884.24 v1(944.53,672.47) 944.53,651.71 844.28,551.46 v1(616.73,551.46) ; v1(1049.55,960.74) 1167.53,960.74 1215.33,1008.54 v1(1540,1008.54) 1561.2,1008.54 1588.1,981.64 1588.1,795.17 v1(1459.1,666.17) 1418.17,666.17 1377.5,625.5 1377.5,600.89 v1@1375.23,598.61 ; v1(1374.85,599.24) 1374.85,521.78 1438.97,457.66 1693.34,457.66 1806.36,344.64 v1(2378.35,344.64) ; v1(1459.1,666.17) v1@1459.07,861.92 ; v1(2386,121.46) 2386,225.27 v1(2420.31,259.59) 2420.31,302.68 v1(2378.35,344.64) ; 2479.55,552.71 2479.55,589.35 ; v1@2479.55,616.53 v1@2479.55,671.07 ; v1(2480.05,620.5) 2484.02,616.53 2484.02,589.35 ; v1@2480.05,676.55 2481.7,678.2 2481.7,683.15 v1(2819.05,1020.5) ; v1(2834.57,329.11) 2703.15,329.11 v1(2615.76,416.5) 2614.11,418.15 2611.04,418.15 2500.25,528.94 2485.51,528.94 2479.55,534.9 2474.33,529.68 v1(2412.85,529.68) 2378.35,495.18 v1(2378.35,344.64) ; SW1.6@208.98,1369.92 213.56,1365.35 248.65,1365.35 275,1339 275,1127 232.64,1084.64 232.64,606.63 287.81,551.46 v1(616.73,551.46)
  other v1: 2480.05,672.8 2480.05,725.09 1459.03,861.96
+3V3_BATT: C15.2 C16.2 C17.2 C18.2 R14.2 U5.4 U5.5 U8.3
+3V3_USB: C7.2 U4.2 U8.6 | length 2514.5
  Layer 2 w15: v1(1377,188) v1(1377,345) ; v1(1377,240.33) 1557.15,240.33 1611.92,295.11 2258.95,295.11 2375.13,411.29 2537.01,411.29 2621,495.28 2621,767.36 2833.65,980.01 2948.04,980.01 2977.42,1009.39 2977.42,1175.28 2942.54,1210.16 v1(2878.57,1210.16)
  other v1: 1377,292.67
+5V_OUT: C2.1 C8.2 C9.1 C12.2 D4.2 D5.1 U2.4 U2.8 U4.3
  other v1: 1056.46,605.32 1096.23,605.32 1136,605.32 696,1106.83 734.52,1106.83 773.04,1106.83 696,1156.06 773.04,1156.06 1272.04,1258.84 1306,1258.61 1069.09,1479 1069.09,1520.99
ALRT: R49.1 U6.6 U11.5 | length 1143.7
  Top Layer w8: v1(1717,668.6) 1717,513 1750.09,479.91 2127.91,479.91 2195.62,547.62 U6.6@2300.16,547.62
  Bottom Layer w8: v1(1374.23,698.43) 1376.98,698.43 1386.73,708.17 1677.43,708.17 v1(1717,668.6)
AVDD: C30.2 C31.1 FB2.1 J3.9 J3.12 R28.2 R29.2 R34.2 R35.2 R44.2 TP1.1 U10.1 U10.19
  other v1: 2997.51,462.97 2866.07,535.52 2909.78,535.52 2823.38,536.58 3129.17,538.2 2977.82,550.5 3011.67,662.37 3011.67,710.03 2838.68,822.46 2977.45,821.53
B-: C1.2 J2.2 U1.6 U3.3
CH: R13.1 U12.9 | length 962.5
  Top Layer w8: R13.1@929.5,1426.3 929.5,1457.5 910.99,1476.01 789.74,1476.01 768.41,1454.67 768.41,1276.59 891.08,1153.92 891.08,952.13 911.22,931.99 U12.9@1083.1,931.99
CHG_LED: U6.8 U12.2 | length 1765.7
  Top Layer w8: U12.2@1136.25,951.68 1216.7,951.68 v1(1241.43,926.95) ; U6.8@2300.16,647.62 2301.54,649 v1(2354,649)
  Layer 2 w8: v1(1241.43,926.95) 1205.6,891.12 1205.6,573.96 1264.23,515.34 2220.34,515.34 v1(2354,649)
CHRG: R8.1 R11.1 U6.5 U12.1 | length 2049.3
  Top Layer w8: U12.1@1136.25,931.99 1136.25,919.75 v1(1160,896) ; v1(1243.04,1124) R8.1@1243.04,1155 ; v1(2163,462) 2163,464 2196,497 2299.54,497 U6.5@2300.16,497.62
  Layer 2 w8: v1(1160,896) 1160,551.28 1249.28,462 v1(2163,462)
  Bottom Layer w8: v1(1160,896) 1160,1021.26 1095.81,1085.45 1095.81,1133.46 1119.35,1157 1210.04,1157 v1(1243.04,1124)